# Altium PCB testboard.PcbDoc
Units mm, origin at the board's own origin, x right, y up, seen from the top; angles counter-clockwise.
Board outline 152.4 x 101.6 mm, 2 copper layers (Top Layer, Bottom Layer); 14 components, 21 nets, 61 pads, 0 vias.
Unrouted connection lines stored in the file: 1.
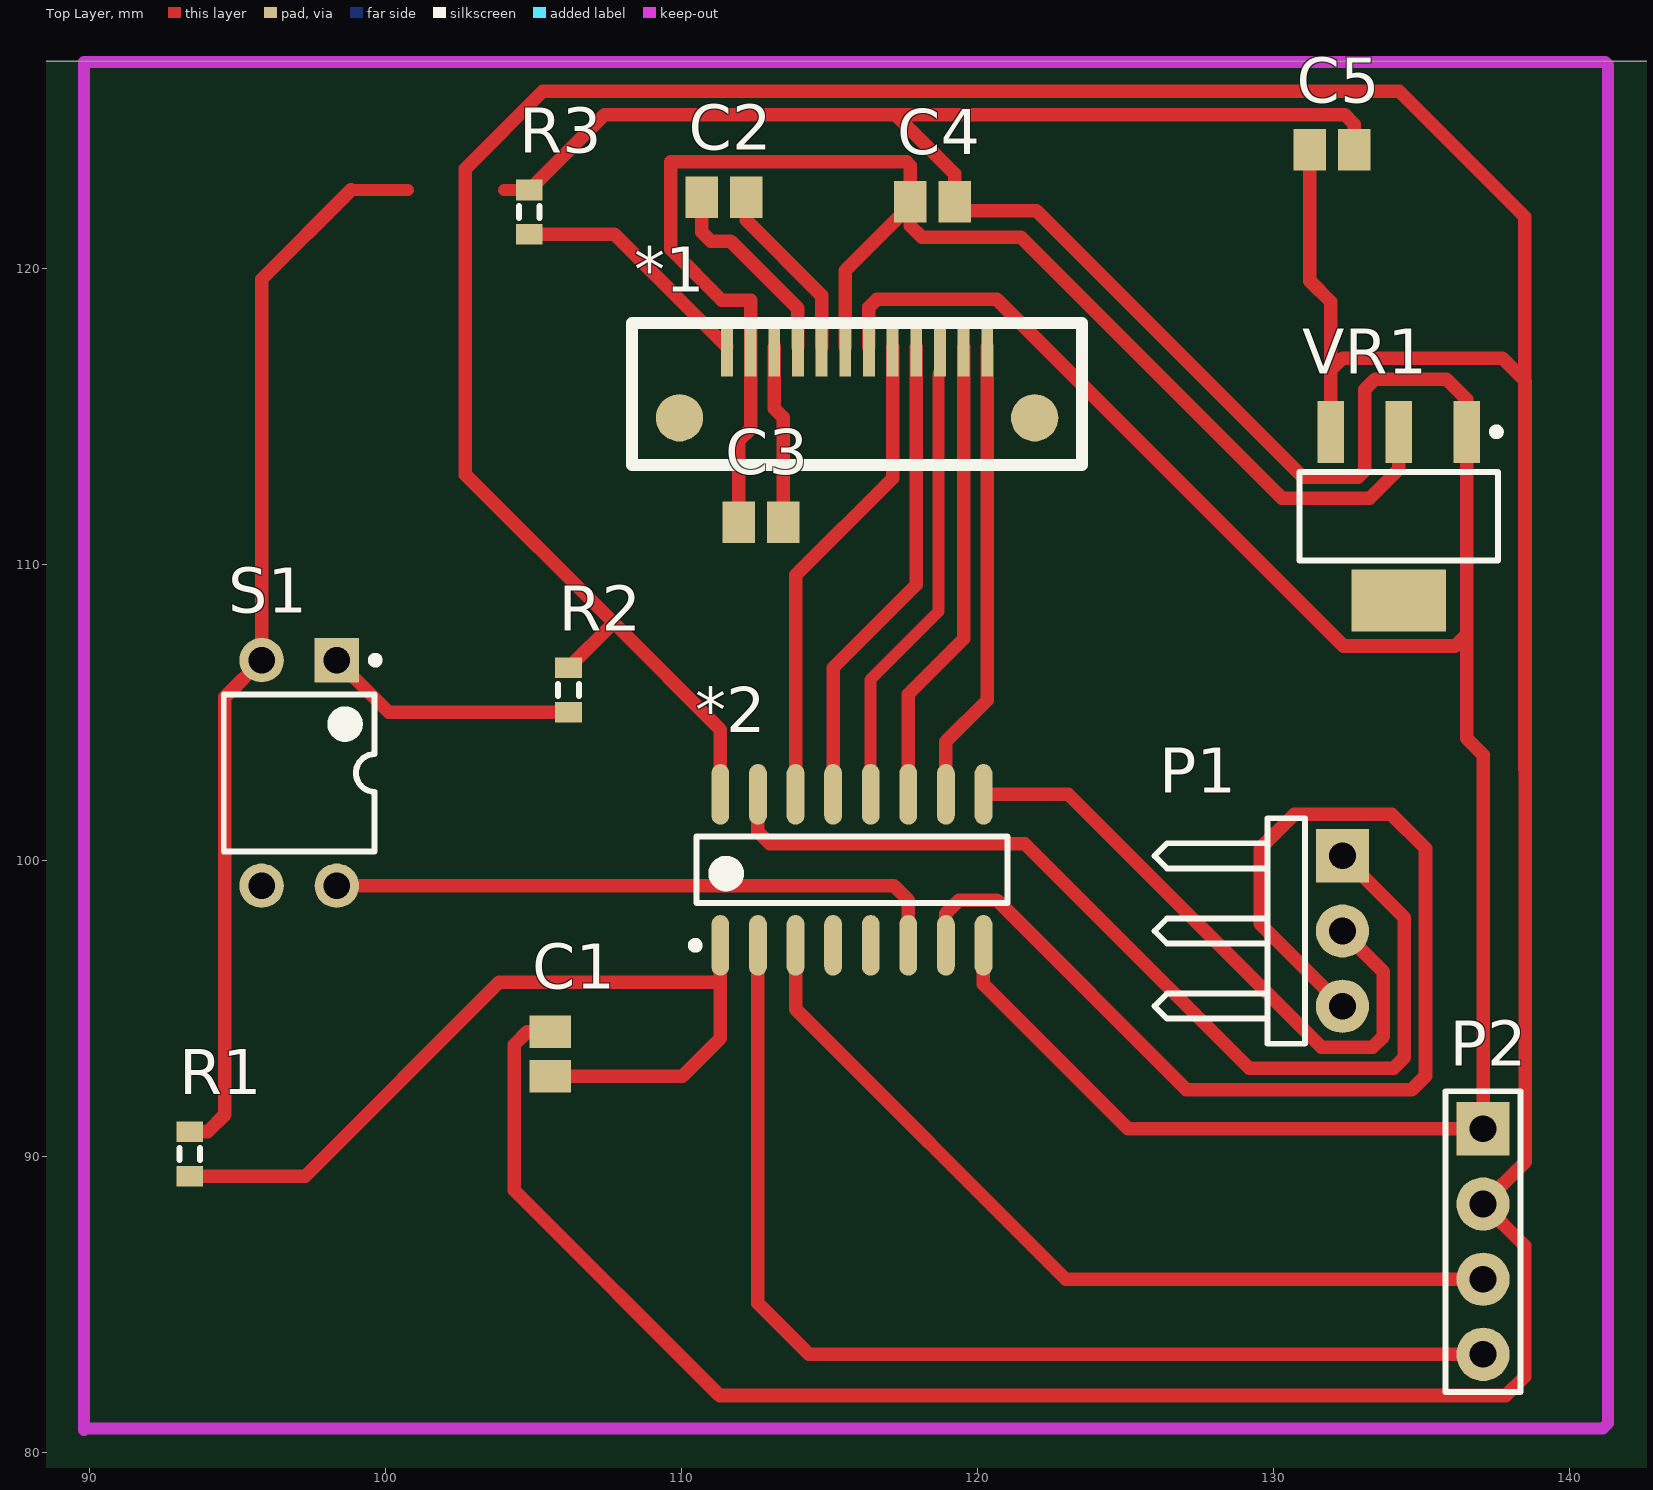
[diagram p0: Top Layer view]
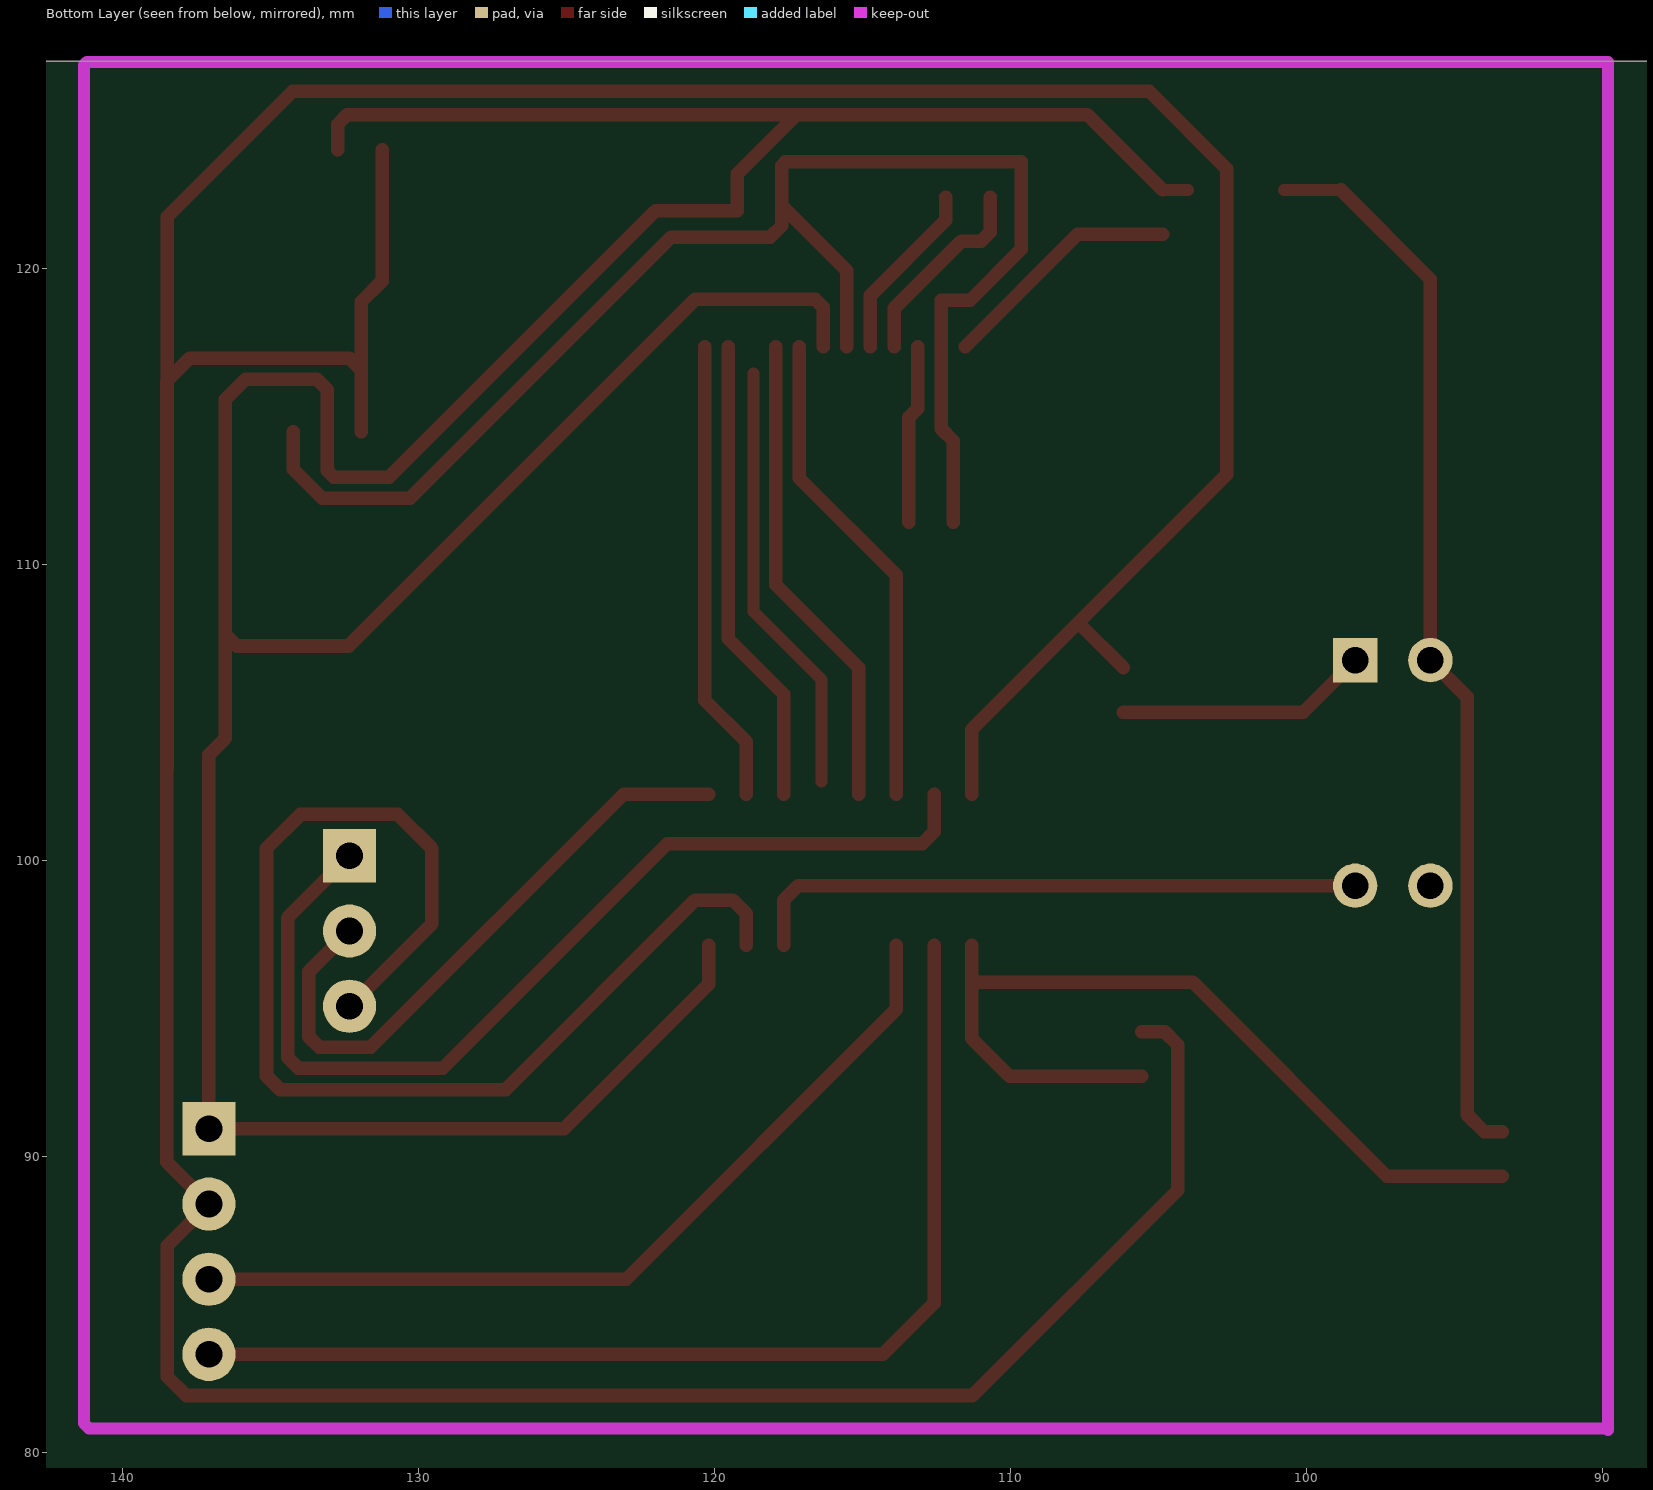
[diagram p1: Bottom Layer view, seen from below]

## Layer stack, top to bottom
Top Layer: signal copper 0.0356
Dielectric: dielectric 0.32, FR-4, Dk 4.8
Bottom Layer: signal copper 0.0356

## Board outline
25.4,25.4 177.8,25.4 177.8,127 25.4,127

## Design rules (kind name [scope] priority, off if disabled: settings)
Clearance [All] p1: gap=0.254
PolygonConnect [All] p1: connectstyle=Relief reliefconductorwidth=0.254 reliefentries=4 polygonreliefangle="90 Angle"
RoutingVias [All] p1: holewidth=0.711 width=1.27 viastyle="Through Hole" minholewidth=0.711 minwidth=1.27 maxholewidth=0.711 maxwidth=1.27
SilkscreenOverComponentPads [All] p1: minsilkscreentomaskgap=0.254
SolderMaskExpansion [All] p1: expansion=0.102
Width [All] p1: maxlimit=0.762 minlimit=0.381 preferedwidth=0.457
27 further rules are at their usual default settings.

## Components (designator, comment, footprint, x,y, rotation, side; value= is the part's Value field where it differs from the comment)
*1 "J1" PCBComponent_1 120.325,118.95 r180 top
*2 "U1" TSOP127P620X160-16N 115.75,99.675 r90 top
C1 "" C0805 105.55,93.45 r90 top
C2 "Cap Pol3" C0805 111.425,122.4 r180 top
C3 "Cap Pol3" C0805 112.675,111.425 r0 top
C4 "Cap Pol3" C0805 118.475,122.25 r180 top
C5 "Cap Pol3" C0805 131.975,124 r180 top
P1 "Header 3H" HDR1X3H 132.325,100.15 r270 top
P2 "Header 4" HDR1X4 137.075,90.925 r270 top
R1 "Res3" J1-0603 93.375,90.075 r270 top
R2 "Res3" J1-0603 106.175,105.75 r90 top
R3 "120" J1-0603 104.85,121.9 r90 top
S1 "SW DIP-2" DIP-4 97.075,102.95 r270 top
VR1 "AMS1117-3.3" SOT223_L 134.225,111.625 r270 top

## Footprints (in the part's own frame and the unit in brackets; to place one, negate y for a bottom-side part, rotate by r counter-clockwise, add the part's x,y. Pads: shape width x height; smd on the part's side, far side on the other; paste and mask are expansions set on the pad)
C0805 [mm] "Chip Capacitor, Body 2.0x1.3mm, IPC High Density"
  rect 1.1x1.4 smd: 1(-0.75,0) 2(0.75,0)
  body extent -1.1,-0.72 1.1,0.72, height 1.4
DIP-4 [mm] "DIP; 4 Leads; Row Spacing 7.62 mm; Pitch 2.54 mm"
  rect 1.5x1.5 hole 0.9: 1(-3.81,1.27)
  round 1.5 hole 0.9: 2(-3.81,-1.27) 3(3.81,-1.27) 4(3.81,1.27)
  silkscreen extent -3.93,-2.55 2.65,2.7, body extent -3.15,-2.5 3.15,2.5, height 5.6
HDR1X3H [mm] "Connector; Header; 3 Position; Right Angle"
  rect 1.8x1.8 hole 0.9: 1(0,0)
  round 1.8 hole 0.9: 2(2.54,0) 3(5.08,0)
  silkscreen extent -1.27,-6.35 6.35,-1.27
HDR1X4 [mm] "Connector; Header; 4 Position"
  rect 1.8x1.8 hole 0.9: 1(0,0)
  round 1.8 hole 0.9: 2(2.54,0) 3(5.08,0) 4(7.62,0)
  silkscreen extent -1.27,-1.27 8.89,1.27
J1-0603 [mm] "Chip Resistor, Body 1.6x0.8mm, IPC High Density"
  rect 0.7x0.9 smd: 1(-0.75,0) 2(0.75,0)
  silkscreen extent -0.2,-0.35 0.2,0.35, body extent -0.85,-0.48 0.85,0.48, height 0.9
PCBComponent_1 [mm]
  rect 0.4x2 smd: 1(0,1.6) 2(0.8,1.6) 3(1.6,1.6) 4(2.4,1.6) 5(3.2,1.6) 6(4,1.6) 7(4.8,1.6) 8(5.6,1.6) 9(6.4,1.6) 10(7.2,1.6) 11(8,1.6) 12(8.8,1.6)
  round 1.6 smd: ""(-1.6,4) ""(10.4,4)
  silkscreen extent -3.2,0.8 12,5.6
SOT223_L [mm] "SOT223, 4-Leads, Body 6.5x3.5mm, Pitch 2.3mm, Lead Span 7mm, IPC High Density"
  rect 2.1x0.9 smd: 1(-2.85,2.3) 2(-2.85,0) 3(-2.85,-2.3)
  rect 2.1x3.2 smd: 4(2.85,0)
  silkscreen extent -2.97,-3.35 1.5,3.43, body extent -1.85,-3.35 1.85,3.35, height 1.7
TSOP127P620X160-16N [mm] "TSOP, 16-Leads, Body 10.5x4.1mm (max), Pitch 1.27mm, IPC Medium Density"
  oval 2.05x0.6 smd: 1(-2.55,4.445) 2(-2.55,3.175) 3(-2.55,1.905) 4(-2.55,0.635) 5(-2.55,-0.635) 6(-2.55,-1.905) 7(-2.55,-3.175) 8(-2.55,-4.445) 9(2.55,-4.445) 10(2.55,-3.175) 11(2.55,-1.905) 12(2.55,-0.635) 13(2.55,0.635) 14(2.55,1.905) 15(2.55,3.175) 16(2.55,4.445)
  silkscreen extent -2.67,-5.25 1.13,5.42, body extent -2.05,-5.25 2.05,5.25, height 1.6

## Part data
*1: library part Component_1
*2: library part Component_3
C1: library part "Cap Pol3", "Polarized Capacitor (Surface Mount)"
C2 C3 C4 C5: "Polarized Capacitor (Surface Mount)"
P1: "Header, 3-Pin, Right Angle"
P2: "Header, 4-Pin"
R1 R2: "Resistor"
R3: library part Res3, "Resistor"
S1: "DIP Switch, 2 Position, SPST"
VR1: library part "Volt Reg", "Voltage Regulator"

## Nets (pads, with @x,y where several pads share a name; then routed paths per layer and width w, separated by ;. In a path a pad name is that pad's centre, name@x,y a point inside that pad or via, vN(x,y) a via of type N, cw(c..) or ccw(c..) an arc to the next point about the centre after c; other vN are vias at no path point)
A0: *2.12
A1: *1.3
CSB: *1.1 *2.10 | length 15.7
  Top Layer w0.457: *2.10 118.925,104.01 120.325,105.41 *1.1
GND: *1.6 *2.8 C4.1 C5.1 P2.1 R1.1 R3.2 S1.2 VR1.1 | length 164.5
  Top Layer w0.457: R1.1 93.98,90.825 94.564,91.409 94.564,105.519 S1.2 95.805,119.63 98.825,122.65 ; R3.2 107.397,125.197 117.218,125.197 ; *1.6 116.325,118.687 116.586,118.948 120.65,118.948 132.359,107.239 136.131,107.239 136.525,107.632 ; *2.8 120.195,95.809 125.079,90.925 P2.1 137.075,103.565 136.525,104.115 136.525,107.632 ; C5.1 132.725,124.869 132.398,125.197 117.218,125.197 ; 117.218,125.197 119.225,123.19 C4.1 119.225,121.945 121.985,121.945 130.988,112.942 132.856,112.942 133.071,113.157 133.071,115.9 133.426,116.256 135.839,116.256 136.525,115.57 VR1.1 136.525,107.632
Net*1_7: *1.7 *1.11 C3.1 C4.2 VR1.2 | length 51.9
  Top Layer w0.457: C3.1 111.925,114.173 112.325,114.573 *1.11 112.325,118.923 111.354,118.923 109.626,120.65 109.626,123.596 117.598,123.596 117.725,123.469 C4.2 C4.2@117.725,122.123 ; *1.7 115.525,119.923 C4.2@117.725,122.123 ; VR1.2 134.225,113.208 133.248,112.231 130.281,112.231 121.456,121.056 118.11,121.056 117.725,121.441 C4.2@117.725,122.123
Net*1_8: *1.8 C2.1 | length 6.1
  Top Layer w0.457: C2.1 112.175,121.633 114.725,119.083 *1.8
Net*1_9: *1.9 C2.2 | length 6.8
  Top Layer w0.457: C2.2 110.675,121.227 110.98,120.922 111.647,120.922 113.925,118.643 *1.9
Net*1_10: *1.10 C3.2 | length 6
  Top Layer w0.457: *1.10 113.125,115.26 113.425,114.96 C3.2
Net*1_12: *1.12 R3.1 | length 8.2
  Top Layer w0.457: R3.1 107.725,121.15 *1.12
Net*2_1: *2.1 C1.1 R1.2 | length 30.1
  Top Layer w0.457: R1.2 97.275,89.325 103.835,95.885 111.305,95.885 ; C1.1 110.025,92.7 111.305,93.98 111.305,95.885 ; *2.1 111.305,95.885
Net*2_6: *2.6 S1.4 | length 21
  Top Layer w0.457: S1.4 117.169,99.14 117.655,98.654 *2.6
NetR2_1: R2.1 S1.1 | length 8.6
  Top Layer w0.457: S1.1 100.105,105 R2.1
P1.7: *2.15 P1.1 | length 34.2
  Top Layer w0.457: *2.15 112.575,100.965 112.978,100.562 121.586,100.562 129.172,92.976 134.05,92.976 134.419,93.345 134.419,98.056 P1.1
P3.4: *2.7 P1.3 | length 41
  Top Layer w0.457: *2.7 118.925,98.199 119.38,98.654 120.65,98.654 127.051,92.253 134.673,92.253 135.13,92.71 135.13,100.404 133.985,101.549 130.694,101.549 129.54,100.395 129.54,97.855 P1.3
P3.7: *2.9 P1.2 | length 21.3
  Top Layer w0.457: *2.9 120.195,102.235 123.063,102.235 131.611,93.687 133.35,93.687 133.708,94.045 133.708,96.227 P1.2
RST: *1.2 *2.11 | length 15.9
  Top Layer w0.457: *2.11 117.655,105.611 119.525,107.481 *1.2
RXD: *2.2 P2.4 | length 37.3
  Top Layer w0.457: *2.2 112.575,85.03 114.3,83.305 P2.4
SCL: *1.4 *2.13 | length 16.3
  Top Layer w0.457: *2.13 115.115,106.502 117.925,109.312 *1.4
SDA: *1.5 *2.14 | length 16.5
  Top Layer w0.457: *2.14 113.845,109.629 117.125,112.909 *1.5
TXD: *2.3 P2.3 | length 29.2
  Top Layer w0.457: *2.3 113.845,94.971 122.971,85.845 P2.3
VCC: *2.16 C1.2 C5.2 P2.2 R2.2 VR1.3 | length 192.7
  Top Layer w0.457: C1.2 104.775,94.2 104.343,93.768 104.343,88.849 111.277,81.915 137.846,81.915 138.481,82.55 138.481,86.979 P2.2 138.506,89.816 ; R2.2 107.699,108.024 ; *2.16 111.305,104.417 107.699,108.024 ; C5.2 131.225,119.572 131.925,118.872 131.925,116.561 ; VR1.3 131.925,116.561 ; 107.699,108.024 102.692,113.03 102.692,123.368 105.308,125.984 134.239,125.984 138.481,121.742 138.485,116.201 ; 131.925,116.561 132.331,116.967 137.719,116.967 138.485,116.201 ; 138.485,116.201 138.506,89.816 ; 138.485,116.201 138.506,116.18 138.506,89.816
pads on no net: *1. *2.4 *2.5 S1.3 VR1.4
copper on no net: | length 17.5
  Top Layer w0.4: 98.825,122.65 100.75,122.65 ; 104,122.65 104.85,122.65 ; 116.375,102.65 116.375,106.1 118.675,108.4 118.675,116.45

## Polygon pours and split planes (outlines as drawn)
GND on Keep-Out Layer "Top Layer-No Net" (hatched 90Degree grid 0.508 track 0.203, remove dead copper): 89.85,80.8 89.8,80.85 89.8,126.975 141.2,126.975 141.3,126.875 141.3,80.975
GND on Keep-Out Layer "Top Layer-No Net" (hatched 90Degree grid 0.508 track 0.203, remove dead copper): 89.85,80.8 89.85,126.925 89.8,126.975 141.2,126.975 141.2,80.9 141.212,80.887

## Keep-outs
Keep-Out Layer:
  lines w0.4: 89.8,80.75 89.8,126.975 141.2,126.975 141.3,126.875 141.3,80.975 141.125,80.8 89.85,80.8 89.8,80.75